# Altium PCB IR.PcbDoc
Units mil, origin at the board's own origin, x right, y up, seen from the top; angles counter-clockwise.
Board outline 800 x 400 mil, 2 copper layers (Top Layer, Bottom Layer); 4 components, 4 nets, 12 pads, 1 vias.
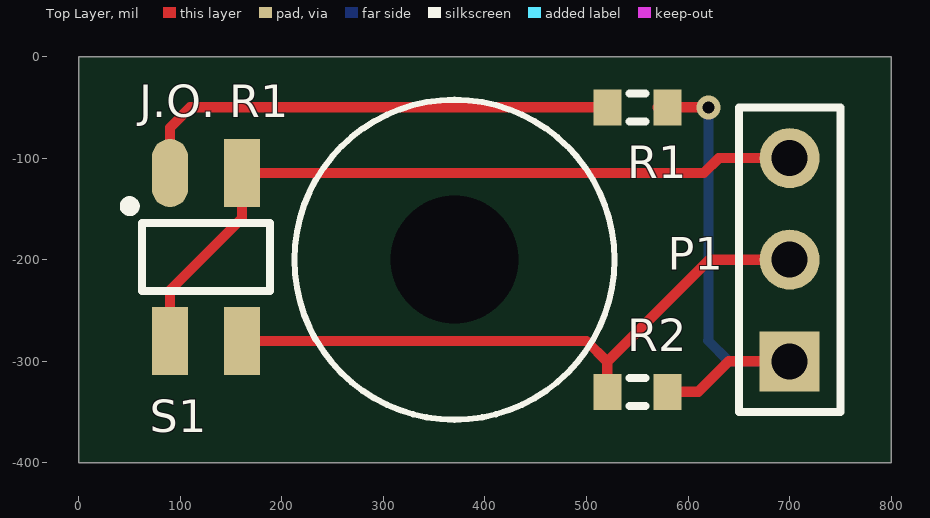
[diagram p0: Top Layer view]
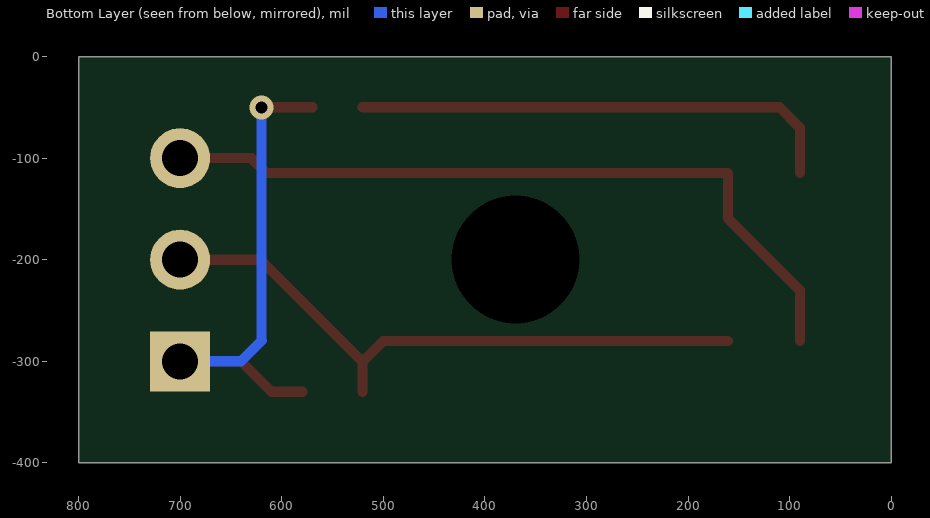
[diagram p1: Bottom Layer view, seen from below]

## Layer stack, top to bottom
Top Solder: solder mask 0.4, Solder Resist, Dk 3.5
Top Layer: signal copper 1.4
Dielectric 1: dielectric 12.6, FR-4, Dk 4.8
Bottom Layer: signal copper 1.4
Bottom Solder: solder mask 0.4, Solder Resist, Dk 3.5

## Board outline
0,-400 0,0 800,0 800,-400

## Design rules (kind name [scope] priority, off if disabled: settings)
Clearance [All] p1: gap=10 ignorepadtopadclearanceinfootprint=FALSE except(0: Arc-Hole Track-Hole SMDPad-Hole THPad-Hole Via-Hole Fill-Hole Poly-Hole Region-Hole Text-Hole)
PolygonConnect [All] p1: connectstyle=Relief reliefconductorwidth=10 reliefentries=4 polygonreliefangle="90 Angle" airgapwidth=10
RoomDefinition IR [InComponentClass('IR')] p1: confinementstyle=ConfineIn formatcopy=TRUE lockcomponents=FALSE outline 0,-400 800,-400 800,0 0,0
RoutingVias [All] p1: holewidth=28 width=50 viastyle="Through Hole" minholewidth=28 minwidth=50 maxholewidth=28 maxwidth=50
SolderMaskExpansion [All] p1: expansion=4
Width [All] p1: maxlimit=10 minlimit=10 preferedwidth=10
30 further rules are at their usual default settings.

## Components (designator, comment, footprint, x,y, rotation, side; value= is the part's Value field where it differs from the comment)
P1 "Header 3" HDR1X3 700,-300 r90 top
R1 "Res1" J1-0603 550,-50 r0 top value=120
R2 "Res1" J1-0603 550,-330 r0 top value=220
S1 "QRE1113" QRE1113GR 90,-114.65 r270 top

## Footprints (in the part's own frame and the unit in brackets; to place one, negate y for a bottom-side part, rotate by r counter-clockwise, add the part's x,y. Pads: shape width x height; smd on the part's side, far side on the other; paste and mask are expansions set on the pad)
HDR1X3 [mm] "Connector; Header; 3 Position"
  rect 1.5x1.5 hole 0.9: 1(0,0)
  round 1.5 hole 0.9: 2(2.54,0) 3(5.08,0)
  silkscreen extent -1.27,-1.27 6.35,1.27
J1-0603 [mm] "Chip Resistor, Body 1.6x0.8mm, IPC High Density"
  rect 0.7x0.9 smd: 1(-0.75,0) 2(0.75,0)
  silkscreen extent -0.2,-0.35 0.2,0.35, body extent -0.85,-0.48 0.85,0.48, height 0.9
QRE1113GR [mm] "SOP, 4-Leads, Body 3.40x2.70mm, Pitch 1.80mm, IPC Medium Density"
  oval 1.7x0.9 smd: 1(0,0)
  rect 1.7x0.9 smd: 2(4.2,0) 3(4.2,1.8) 4(0,1.8)
  silkscreen extent 0.71,-1.13 2.95,2.5

## Part data
P1: "Header, 3-Pin", LatestRevisionDate=17-Jul-2002, LatestRevisionNote="Re-released for DXP Platform.", Publisher="Altium Limited"
R1 R2: "Resistor", LatestRevisionDate=17-Jul-2002, LatestRevisionNote="Re-released for DXP Platform.", PackageDescription="Axial Device, Thru-Hole; 2 Leads; 0.3 in Pin Spacing", PackageReference=AXIAL-0.3, Published=8-Jun-2000, Publisher="Altium Limited"

## Free pads (board coordinates)
  round 0 hole 125.98: 1(370,-200)

## Via types
v1: diameter 23.62, hole 11.81, Top Layer to Bottom Layer, tented both sides, 1 vias

## Nets (pads, with @x,y where several pads share a name; then routed paths per layer and width w, separated by ;. In a path a pad name is that pad's centre, name@x,y a point inside that pad or via, vN(x,y) a via of type N, cw(c..) or ccw(c..) an arc to the next point about the centre after c; other vN are vias at no path point)
NetP1_1: P1.1 R1.2 R2.2 | length 501.6
  Top Layer w10: R1.2@570,-50 v1(620,-50) ; R2.2 610,-330 640,-300 P1.1
  Bottom Layer w10: v1(620,-50) 620,-279.05 619.53,-279.53 640,-300 P1.1
NetP1_2: P1.2 R2.1 S1.3 | length 618.8
  Top Layer w10: S1.3 500,-280 520.47,-300.47 ; R2.1 520.47,-300.47 ; P1.2 620.95,-200 520.47,-300.47
NetP1_3: P1.3 S1.2 S1.4 | length 739.9
  Top Layer w10: S1.2 90,-230 160.87,-159.13 S1.4 615.35,-114.65 630,-100 P1.3
NetR1_1: R1.1 S1.1 | length 483.4
  Top Layer w10: S1.1 90,-70 110,-50 R1.1

## Silkscreen, mask and mechanical layers (free items; w line width, h text height)
Top Overlay:
  circle w6: c370,-200 r157.48
  text "J.O. R1" at 60,-60 h32
Mechanical 1:
  the board outline again, w6